# Altium PCB SimpleNode36.PcbDoc
Units mm, origin at the board's own origin, x right, y up, seen from the top; angles counter-clockwise.
Board outline 33 x 14 mm, 2 copper layers (Top Layer, Bottom Layer); 45 components, 43 nets, 178 pads, 36 vias.
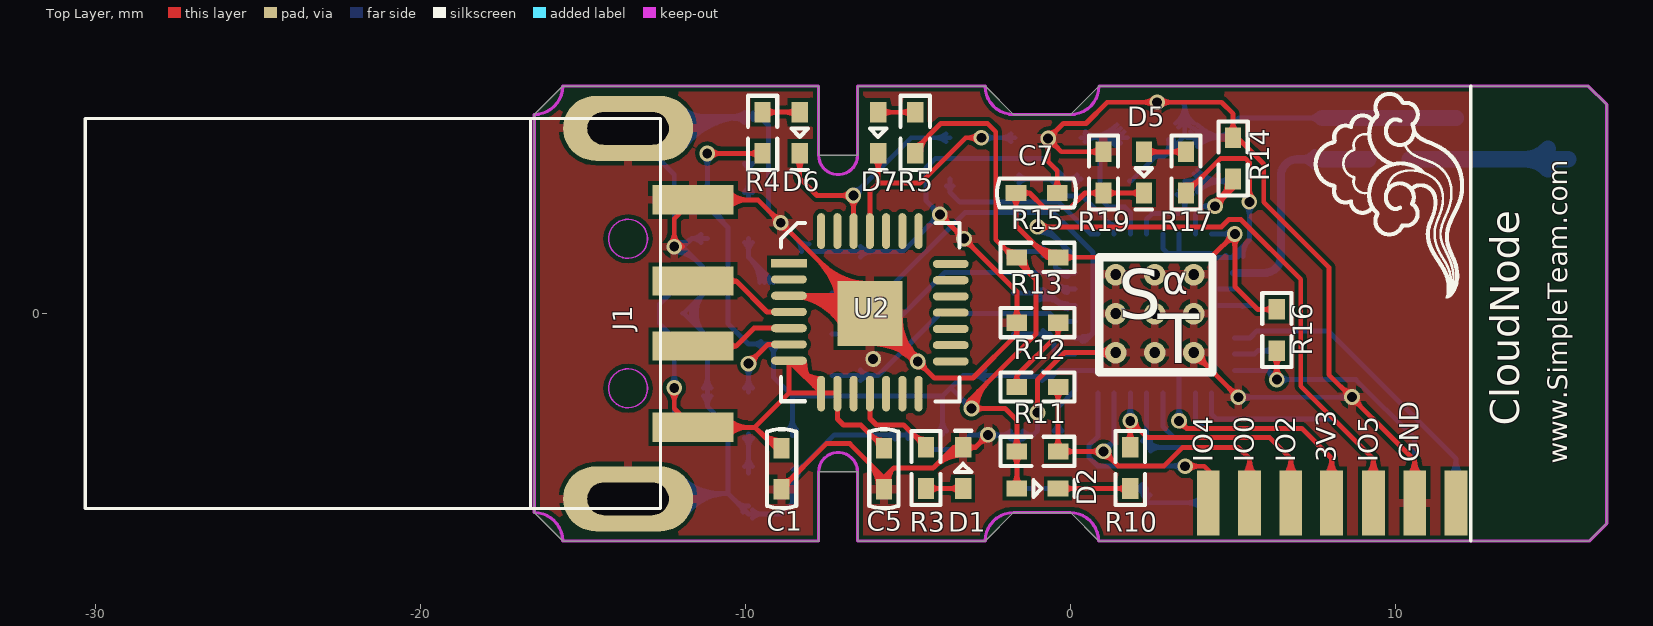
[diagram p0: Top Layer view]
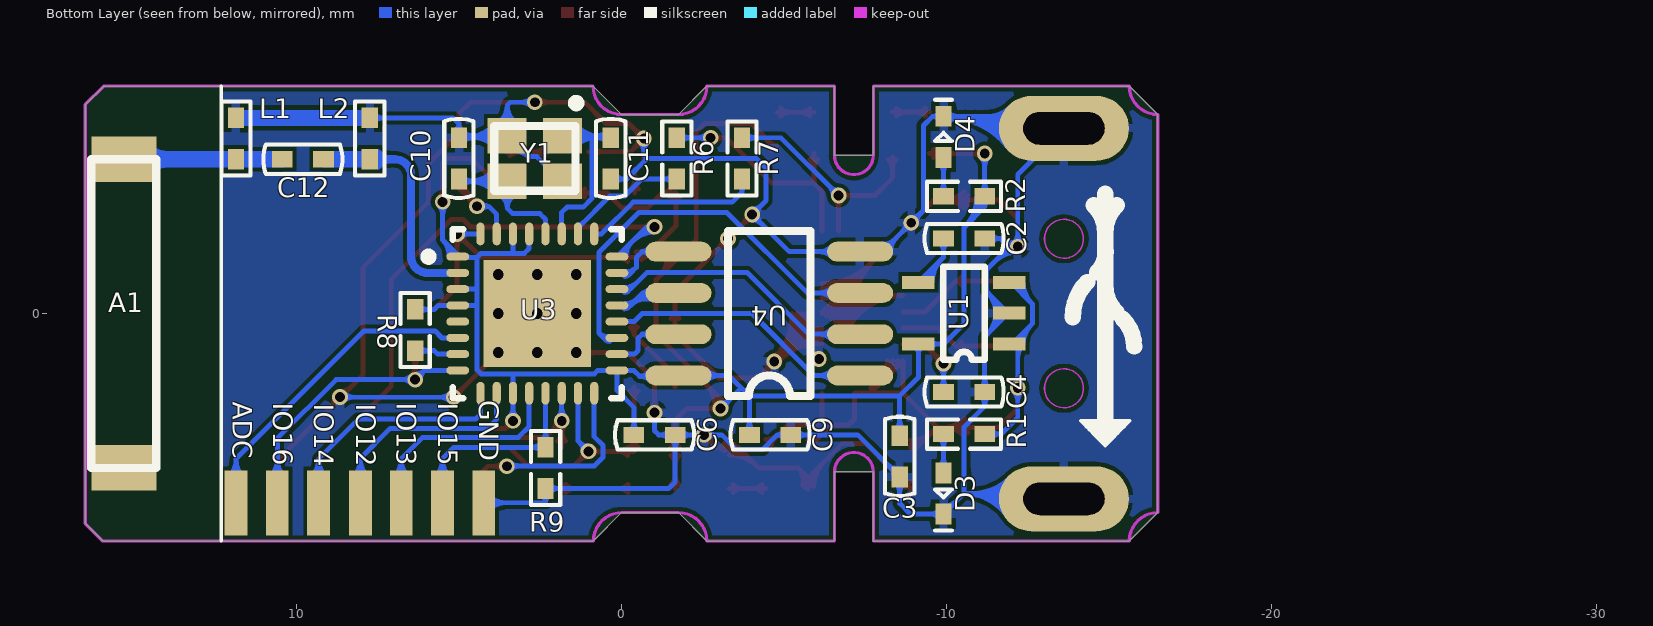
[diagram p1: Bottom Layer view, seen from below]

## Layer stack, top to bottom
Top Layer: signal copper 0.0356
Dielectric: dielectric 0.32, FR-4, Dk 4.8
Bottom Layer: signal copper 0.0356

## Board outline
16.5,6.436 15.936,7 0.875,7 0,6.125 -1.75,6.125 -2.625,7 -6.55,7 -6.55,4.875 -7.75,4.875 -7.75,7 -15.625,7 -16.5,6.125 -16.5,-6.125 -15.625,-7 -7.75,-7 -7.75,-4.875 -6.55,-4.875 -6.55,-7 -2.625,-7 -1.75,-6.125 0,-6.125 0.864,-6.989 0.864,-7 15.962,-7 16.5,-6.462 16.5,6.436

## Design rules (kind name [scope] priority, off if disabled: settings)
Clearance [All] p1: gap=0.127
DiffPairsRouting [All] p1: maxlimit=0.254 minlimit=0.254 mostfreqgap=0.254 maxuncoupledlength=12.7
MinimumSolderMaskSliver [All] p1 off: minsoldermaskwidth=0.127
PolygonConnect [All] p1: connectstyle=Relief reliefconductorwidth=0.254 reliefentries=4 polygonreliefangle="90 Angle"
RoutingVias [All] p1: holewidth=0.305 width=0.483 viastyle="Through Hole" minholewidth=0.305 minwidth=0.483 maxholewidth=0.711 maxwidth=1.27
SilkToSilkClearance [All] p1 off: silktosilkclearance=0.127
SilkscreenOverComponentPads [All] p1 off: minsilkscreentomaskgap=0.127
SolderMaskExpansion [All] p1: expansion=0.102
Width [All] p1: maxlimit=0.508 minlimit=0.152 preferedwidth=0.152
24 further rules are at their usual default settings.

## Classes and differential pairs
differential pair UD: +UD_P -UD_N

## Components (designator, comment, footprint, x,y, rotation, side; value= is the part's Value field where it differs from the comment)
A1 "2.4GHz" AN9520-245 15.316,0 r180 bottom
C1 "105" C0402 -8.89,-4.775 r90 top
C2 "CAP" C0402 -10.541,2.311 r0 bottom
C3 "CAP" C0402 -8.56,-4.394 r90 bottom
C4 "10V" C0402 -10.541,-2.413 r0 bottom
C5 "10V" C0402 -5.74,-4.775 r270 top
C6 "10V" C0402 -1.016,-3.734 r0 bottom
C7 "10V" C0402 -1.041,3.708 r180 top
C9 "10V" C0402 -4.572,-3.734 r0 bottom
C10 "10V" C0402 5.004,4.775 r90 bottom locked
C11 "10V" C0402 0.33,4.775 r270 bottom locked
C12 "10V" C0402 9.804,4.75 r180 bottom
D1 "STA" LED0402 -3.302,-4.75 r90 top
D2 "STA" LED0402 -1.016,-5.385 r0 top
D3 "PW5V" LED0402 -9.906,-5.537 r270 bottom
D4 "PW3V3" LED0402 -9.906,5.436 r90 bottom
D5 "STA" LED0402 2.261,4.343 r270 top
D6 "TXD" LED0402 -8.331,5.563 r270 top
D7 "RXD" LED0402 -5.918,5.563 r270 top
J1 "USB-A" "USB 2.0 Type A 公头 沉板" -13.614,0 r0 top
L1 "NC" L0402 11.862,5.385 r90 bottom
L2 "NC" L0402 7.747,5.385 r90 bottom
R1 "5%" R0402 -10.541,-3.708 r0 bottom
R2 "5%" R0402 -10.541,3.607 r180 bottom
R3 "5%" R0402 -4.445,-4.75 r270 top
R4 "5%" R0402 -9.474,5.563 r270 top
R5 "5%" R0402 -4.775,5.563 r90 top
R6 "5%" R0402 -1.702,4.775 r90 bottom
R7 "5%" R0402 -3.708,4.775 r270 bottom
R8 "1%" R0402 6.35,-0.508 r270 bottom
R9 "5%" R0402 2.337,-4.75 r90 bottom
R10 "5%" R0402 1.841,-4.75 r90 top
R11 "5%" R0402 -1.016,-4.242 r180 top
R12 "5%" R0402 -1.016,-2.261 r180 top
R13 "FLASH" R0402 -1.016,-0.279 r0 top
R14 "1%" R0402 5.004,4.775 r90 top
R15 "5%" R0402 -1.016,1.727 r180 top
R16 "5%" R0402 6.35,-0.508 r270 top
R17 "5%" R0402 3.556,4.343 r90 top
R19 "RESET" R0402 1.016,4.343 r270 top
U1 "SPX3819M5-L-3-3" SOT25-5 -10.541,0.076 r0 bottom
U2 "CP2102" MLP28 -6.172,0 r0 top locked
U3 "ESP8266" QFN32L 2.591,0 r180 bottom
U4 "2M Flash" SOP8 -4.547,0 r0 bottom locked
Y1 "10ppm" XTAL-2520 2.667,4.775 r0 bottom locked

## Footprints (in the part's own frame and the unit in brackets; to place one, negate y for a bottom-side part, rotate by r counter-clockwise, add the part's x,y. Pads: shape width x height; smd on the part's side, far side on the other; paste and mask are expansions set on the pad)
AN9520-245 [mm]
  rect 2x1.4 smd: 0(0,-4.75) 1(0,4.75)
  silkscreen extent -1,-4.75 1,4.75
C0402 [mm]
  rect 0.635x0.5 smd: 1(-0.635,0) 2(0.635,0)
  silkscreen extent -1.22,-0.45 1.22,0.45
L0402 [mm]
  rect 0.635x0.5 smd: 1(-0.635,0) 2(0.635,0)
  silkscreen extent -1.14,-0.45 1.14,0.45
LED0402 [mm]
  rect 0.635x0.5 smd: 1(-0.632,0) 2(0.633,0)
  silkscreen extent -0.13,-0.25 1.14,0.25
MLP28 [mm]
  rect 1.1x0.25 smd: 1(-2.489,1.549)
  oval 1.1x0.25 smd: 2(-2.489,1.049) 3(-2.489,0.549) 4(-2.489,0.049) 5(-2.489,-0.451) 6(-2.489,-0.951) 7(-2.489,-1.451) 15(2.489,-1.473) 16(2.489,-0.973) 17(2.489,-0.473) 18(2.489,0.027) 19(2.489,0.527) 20(2.489,1.027) 21(2.489,1.527)
  rect 2x2 smd: 3(0,0)
  oval 0.25x1.1 smd: 8(-1.499,-2.464) 9(-0.999,-2.464) 10(-0.499,-2.464) 11(0.001,-2.464) 12(0.501,-2.464) 13(1.001,-2.464) 14(1.501,-2.464) 22(1.499,2.54) 23(0.999,2.54) 24(0.499,2.54) 25(-0.001,2.54) 26(-0.501,2.54) 27(-1.001,2.54) 28(-1.501,2.54)
  silkscreen extent -2.74,-2.71 2.76,2.79
QFN32L [mm]
  oval 0.7x0.25 smd: 1(-2.45,1.75) 2(-2.45,1.25) 3(-2.45,0.75) 4(-2.45,0.25) 5(-2.45,-0.25) 6(-2.45,-0.75) 7(-2.45,-1.25) 8(-2.45,-1.75) 17(2.45,-1.75) 18(2.45,-1.25) 19(2.45,-0.75) 20(2.45,-0.25) 21(2.45,0.25) 22(2.45,0.75) 23(2.45,1.25) 24(2.45,1.75)
  oval 0.25x0.7 smd: 9(-1.75,-2.45) 10(-1.25,-2.45) 11(-0.75,-2.45) 12(-0.25,-2.45) 13(0.25,-2.45) 14(0.75,-2.45) 15(1.25,-2.45) 16(1.75,-2.45) 25(1.75,2.45) 26(1.25,2.45) 27(0.75,2.45) 28(0.25,2.45) 29(-0.25,2.45) 30(-0.75,2.45) 31(-1.25,2.45) 32(-1.75,2.45)
  rect 3.3x3.3 smd: 33(0,0)
  silkscreen extent -3.48,-2.6 2.6,2.6, body extent -2.58,-2.58 2.58,2.58, height 0.8
R0402 [mm]
  rect 0.635x0.5 smd: 1(-0.635,0) 2(0.635,0)
  silkscreen extent -1.14,-0.45 1.14,0.45
SOP8 [mil]
  oval 80x24 smd: 1(-110,75) 2(-110,25) 3(-110,-25) 4(-110,-75) 5(110,-75) 6(110,-25) 7(110,25) 8(110,75)
  silkscreen extent -50,-100 50,100, body extent -125,-98 125,99, height 74
SOT25-5 [mm]
  rect 1x0.4 smd: 1(-1.397,1.016) 2(-1.397,0.066) 3(-1.397,-0.884) 4(1.403,-0.884) 5(1.403,1.016)
  silkscreen extent -0.64,-1.36 0.64,1.49
"USB 2.0 Type A 公头 沉板" [mm]
  oval 1.5x1.4 on Bottom Overlay: 1(-1.27,3.683)
  rect 2.5x0.9 smd: 1(2,-3.5) 2(2,-1) 3(2,1) 4(2,3.5)
  oval 4x2 hole 1 slot 2.5 at 0 deg: 4(0,-5.7) 4(0,5.7)
  Keep-Out Layer circle w0.05: c0,-2.3 r0.6
  Keep-Out Layer circle w0.05: c0,2.3 r0.6
  silkscreen extent -16.7,-6 1,6
XTAL-2520 [mm]
  rect 1.2x1.1 smd: 1(-0.85,-0.7) 2(0.85,-0.7) 3(0.85,0.7) 4(-0.85,0.7)
  silkscreen extent -1.4,-1.83 1.25,1

## Part data
A1: library part AN9520-245
C1 C7: library part 贴片无极性电容
D1 D2 D3 D4: library part 贴片发光二级管
D5 D6 D7: library part 贴片发光二级管, "贴片发光二级管"
R4 R5 R6 R7 R15 R16 R17 R19: library part 贴片电阻
U4: library part GD25Q16CSIG

## Free pads (board coordinates)
  rect 0.7x2 smd: 1(4.242,-5.822) 2(5.511,-5.822) 3(6.781,-5.822) 4(8.033,-5.822) 5(9.321,-5.822) 6(10.591,-5.822) 7(11.861,-5.822)
  rect 0.7x2 smd far side: 8(4.241,-5.822) 9(5.511,-5.822) 10(6.781,-5.822) 11(8.033,-5.822) 12(9.321,-5.822) 13(10.591,-5.822) 14(11.861,-5.822)

## Via types
v1: diameter 0.483, hole 0.305, Top Layer to Bottom Layer, 27 vias
v2: diameter 0.66, hole 0.33, Top Layer to Bottom Layer, tented top, 9 vias

## Nets (pads, with @x,y where several pads share a name; then routed paths per layer and width w, separated by ;. In a path a pad name is that pad's centre, name@x,y a point inside that pad or via, vN(x,y) a via of type N, cw(c..) or ccw(c..) an arc to the next point about the centre after c; other vN are vias at no path point)
ADC: pad.14 U3.6 | length 10.9
  Bottom Layer w0.152: U3.6 5.524,-0.75 5.74,-0.533 7.925,-0.533 11.862,-4.47 pad.14 ; pad.14@11.668,-4.978 ccw(c11.199,-4.51) 11.862,-4.51 ; 11.862,-4.512 ccw(c12.521,-4.512) pad.14@12.055,-4.978
GND: C1.1 C2.1 C3.1 C4.1 C5.2 C6.1 C7.1 C9.1 C10.2 C11.2 D1.2 D3.2 D4.2 J1.4 L1.2 L2.2 pad.6 pad.8 R9.1 R13.1 R14.2 R19.1 U1.2 U2.3 U3.33 U4.4 Y1.2 Y1.4 | length 255.7
  Top Layer w0.152: v1@-12.309,2.174 ccw(c-12.591,2.456) -12.192,2.456 ccw(c-11.793,2.456) v1@-12.075,2.174 ; v1@-12.116,2.235 -11.938,2.057 ; v1@-12.041,1.99 cw(c-11.938,1.945) -11.938,2.057 ; v1@-12.041,2.124 ccw(c-11.938,2.17) -11.938,2.057 ; J1.4@-10.658,3.343 cw(c-10.28,2.965) -10.28,3.5 cw(c-10.28,4.035) J1.4@-10.658,3.657 ; J1.4@-10.55,3.236 cw(c-9.912,2.598) -9.912,3.5 cw(c-9.912,4.402) J1.4@-10.55,3.764 ; v1@-9.08,2.794 ccw(c-9.479,2.794) -9.197,3.076 ccw(c-8.915,3.358) v1@-8.915,2.959 ; v1@-8.915,2.629 cw(c-8.915,2.23) -8.634,2.512 cw(c-8.352,2.794) v1@-8.75,2.794 ; C1.1 -8.89,-5.385 -7.51,-4.005 -6.79,-4.005 -5.74,-5.054 ; C1.1@-8.89,-5.169 ccw(c-8.89,-4.648) -8.522,-5.016 ; C1.1@-8.716,-5.343 cw(c-8.398,-5.343) -8.623,-5.118 ; U2.3@-8.404,0.549 cw(c-8.404,-1.225) U2.3@-6.848,-0.371 ; U2.3@-8.207,0.51 cw(c-8.11,0.378) -8.086,0.54 ; U2.3@-8.195,0.576 ccw(c-7.995,0.705) -8.045,0.472 ; U2.3@-8.146,0.549 cw(c-8.146,-1.084) U2.3@-6.715,-0.298 ; -7.889,0.549 cw(c-7.889,-0.942) U2.3@-6.581,-0.225 ; -7.785,1.664 cw(c-9.449,0) U2.3@-7.096,0 ; -7.663,1.541 ccw(c-6.172,3.031) U2.3@-6.172,0.924 ; -7.631,0.549 cw(c-7.631,-0.801) U2.3@-6.448,-0.151 ; -7.525,1.404 cw(c-8.929,0) U2.3@-6.944,0 ; -7.402,1.281 ccw(c-6.172,2.511) U2.3@-6.172,0.771 ; -7.374,0.549 cw(c-7.374,-0.66) U2.3@-6.314,-0.078 ; -7.265,1.143 cw(c-8.408,0) U2.3@-6.791,0 ; -7.142,1.021 ccw(c-6.172,1.991) U2.3@-6.172,0.619 ; U2.3@-7.116,0.549 cw(c-7.116,-0.518) U2.3@-6.18,-0.005 ; U2.3@-7.076,0.549 ccw(c-7.076,0.904) U2.3@-6.825,0.653 ; U2.3@-7.005,0.883 cw(c-7.888,0) U2.3@-6.639,0 ; U2.3@-6.982,-0.444 ccw(c-8.661,-1.366) -8.661,0.549 U2.3@-6.722,0.549 ; U2.3@-6.882,0.761 ccw(c-6.172,1.47) U2.3@-6.172,0.467 ; -6.241,-4.554 cw(c-7.03,-5.343) C5.2@-5.914,-5.343 ; U2.3@-6.172,-0.924 cw(c-6.172,-3.154) -4.595,-1.577 cw(c-3.018,0) U2.3@-5.248,0 ; U2.3@-6.172,-0.771 cw(c-6.172,-2.634) -4.855,-1.317 cw(c-3.538,0) U2.3@-5.401,0 ; U2.3@-6.172,-0.619 cw(c-6.172,-2.113) -5.116,-1.057 cw(c-4.059,0) U2.3@-5.553,0 ; U2.3@-6.172,-0.467 cw(c-6.172,-1.593) -5.376,-0.797 cw(c-4.579,0) U2.3@-5.706,0 ; U2.3@-6.172,0 -6.172,0.051 v1(-8.915,2.794) -9.621,3.5 -11.614,3.5 -12.192,2.922 v1(-12.192,2.057) -11.938,2.057 ; -5.981,-4.814 cw(c-6.51,-5.343) C5.2@-5.762,-5.343 ; C5.2@-5.822,-5.189 ccw(c-5.893,-5.054) -5.74,-5.054 ; C5.2 -5.74,-5.054 ; C5.2@-5.72,-5.337 cw(c-5.328,-5.22) -5.617,-4.931 ; -5.721,-5.074 cw(c-5.989,-5.343) C5.2@-5.609,-5.343 ; C5.2@-5.659,-5.189 cw(c-5.588,-5.054) -5.74,-5.054 ; C5.2@-5.574,-5.293 cw(c-5.048,-5.137) -5.436,-4.75 ; -5.284,-1.039 ccw(c-4.834,-0.822) v1@-4.732,-1.312 ; U2.3@-5.177,-0.869 cw(c-5.35,-1.339) v1@-4.861,-1.44 ; -5.067,-1.162 cw(c-5.371,-1.578) v1@-4.862,-1.499 ; -5.01,-1.105 ccw(c-4.594,-0.801) v1@-4.674,-1.31 ; -4.988,-1.319 cw(c-5.152,-1.567) v1@-4.861,-1.507 ; -4.934,-1.259 ccw(c-4.768,-1.031) v1@-4.724,-1.31 ; -4.913,-1.238 cw(c-5.141,-1.404) v1@-4.862,-1.448 ; v1@-4.864,-1.473 ccw(c-5.263,-1.473) -4.981,-1.191 ccw(c-4.699,-0.91) v1@-4.699,-1.308 ; -4.854,-1.184 ccw(c-4.605,-1.021) v1@-4.666,-1.312 ; v1@-4.699,-1.638 cw(c-4.699,-2.037) -4.417,-1.755 cw(c-4.135,-1.473) v1@-4.534,-1.473 ; v1(-4.699,-1.473) -4.191,-1.981 -2.997,-1.981 -1.651,-0.635 ; -4.21,-4.735 cw(c-3.302,-5.643) D1.2@-3.302,-4.359 ; v1@-4.02,2.883 cw(c-4.02,2.484) -3.738,2.766 cw(c-3.456,3.048) v1@-3.855,3.048 ; v1(-4.02,3.048) -1.651,0.679 R13.1 ; -3.95,-4.475 cw(c-3.302,-5.122) D1.2@-3.302,-4.206 ; -3.69,-4.214 cw(c-3.302,-4.602) D1.2@-3.302,-4.054 ; D1.2@-3.455,-4.2 ccw(c-3.593,-4.273) -3.593,-4.117 ; D1.2@-3.455,-4.035 cw(c-3.593,-3.961) -3.593,-4.117 ; v1@-3.442,2.305 ccw(c-3.84,2.305) -3.558,2.587 ccw(c-3.277,2.868) v1@-3.277,2.47 ; v1@-3.277,2.14 cw(c-3.277,1.741) -2.995,2.023 cw(c-2.713,2.305) v1@-3.111,2.305 ; D1.2@-3.17,-4.231 cw(c-2.924,-4.443) -2.924,-4.117 ; D1.2@-3.17,-4.004 ccw(c-2.924,-3.792) -2.924,-4.117 ; v1@-2.705,-3.734 cw(c-3.104,-3.734) -2.822,-4.016 cw(c-2.54,-4.297) v1@-2.54,-3.899 ; v1(-2.54,-3.734) -2.923,-4.117 ; R13.1@-1.774,-0.157 ccw(c-2.071,0.14) -1.651,0.14 ccw(c-1.231,0.14) R13.1@-1.528,-0.157 ; R13.1@-1.758,-0.417 cw(c-1.928,-0.635) -1.651,-0.635 ; R13.1@-1.651,-0.33 -1.651,-0.635 ; R13.1@-1.544,-0.417 ccw(c-1.374,-0.635) -1.651,-0.635 ; v1@-1.133,-2.931 ccw(c-1.415,-2.649) -1.016,-2.649 ccw(c-0.617,-2.649) v1@-0.899,-2.931 ; v1(-1.016,-3.048) -1.016,-2.041 -0.175,-1.2 v2(1.391,-1.2) ; v1@-0.803,5.268 cw(c-1.084,4.986) -0.686,4.986 cw(c-0.287,4.986) v1@-0.569,5.268 ; v1@-0.686,5.22 cw(c-0.686,4.821) -0.404,5.103 cw(c-0.122,5.385) -0.521,5.385 cw(c-0.122,5.385) -0.404,5.667 cw(c-0.686,5.948) v1@-0.686,5.55 ; C7.1@-0.529,3.831 ccw(c-0.826,4.128) -0.406,4.128 ccw(c0.013,4.128) C7.1@-0.284,3.831 ; C7.1 -0.406,4.394 -0.686,4.674 v1(-0.686,5.385) ; R19.1@0.893,4.856 ccw(c0.596,4.559) 0.596,4.978 ccw(c0.596,5.398) R19.1@0.893,5.101 ; R19.1 -0.279,4.978 v1(-0.686,5.385) ; v2@1.211,-1.379 ccw(c0.778,-1.813) 0.778,-1.2 ccw(c0.778,-0.587) v2@1.211,-1.021 ; v1@2.55,6.386 ccw(c2.268,6.104) 2.268,6.502 ccw(c2.268,6.901) v1@2.55,6.619 ; v1@2.784,6.386 cw(c3.066,6.104) 3.066,6.502 cw(c3.066,6.901) v1@2.784,6.619 ; v2@3.791,-1.454 cw(c3.791,-2.067) 4.224,-1.633 cw(c4.657,-1.2) v2@4.045,-1.2 ; v2(3.791,-1.2) v1(5.166,-2.575) ; R14.2@4.881,5.601 ccw(c4.584,5.897) 5.004,5.897 ccw(c5.423,5.897) R14.2@5.127,5.601 ; v1@5.001,-2.575 ccw(c4.602,-2.575) 4.884,-2.293 ccw(c5.166,-2.011) v1@5.166,-2.41 ; 8.336,-2.266 ccw(c8.661,-1.94) v1@8.661,-2.4 ; 8.398,-2.327 cw(c8.159,-2.565) v1@8.496,-2.565 ; v1@8.661,-2.73 cw(c8.661,-3.068) 8.9,-2.829 ; v1@8.826,-2.565 ccw(c9.286,-2.565) 8.961,-2.891 ; pad.6@10.4,-4.976 ccw(c9.956,-4.521) 10.592,-4.521 ; pad.6 10.592,-4.521 ; pad.6@10.783,-4.976 cw(c11.229,-4.521) 10.592,-4.521 ; -5.74,-5.054 -5.436,-4.75 ; -5.436,-4.75 -4.225,-4.75 -3.593,-4.117 ; -3.593,-4.117 D1.2 -2.923,-4.117 ; v1(-0.686,5.385) -0.221,5.85 0.476,5.85 1.129,6.502 v1(2.667,6.502) 4.648,6.502 5.004,6.147 R14.2 5.138,5.41 5.948,4.6 5.948,3.425 7.95,1.422 7.95,-1.88 10.592,-4.521
  Bottom Layer w0.152: J1.4@-13.449,-5.535 -10.541,-5.535 ; J1.4@-13.246,6.068 J1.4@-11.824,6.068 ; J1.4@-12.538,4.886 -12.538,5.354 J1.4@-11.824,6.068 ; J1.4@-12.489,5.598 cw(c-11.504,4.801) -11.504,6.068 ; J1.4@-12.37,5.502 cw(c-11.184,4.542) -11.184,6.068 ; v1@-12.309,2.174 ccw(c-12.591,2.456) -12.192,2.456 ccw(c-11.793,2.456) v1@-12.075,2.174 ; J1.4@-12.252,5.406 cw(c-10.865,4.283) -10.865,6.068 ; J1.4@-12.23,-5.965 cw(c-11.411,-6.529) -11.411,-5.535 ; v1@-12.192,1.892 cw(c-12.192,0.881) -11.477,1.596 ; v1@-12.192,2.045 cw(c-12.192,1.401) -11.737,1.856 ; J1.4@-12.192,5.055 J1.4@-13.614,5.7 ; v1@-12.187,2.069 ccw(c-12.065,2.387) -11.824,2.146 ; J1.4@-12.177,-5.262 ccw(c-11.519,-4.605) -11.519,-5.535 ; J1.4@-12.133,5.31 cw(c-10.545,4.025) -10.545,6.068 ; v1@-12.132,2.211 ccw(c-11.972,2.625) -11.659,2.311 ; J1.4@-12.105,-6.051 cw(c-11.121,-6.729) -11.121,-5.535 ; J1.4@-12.069,-5.155 ccw(c-11.151,-4.237) -11.151,-5.535 ; J1.4@-12.069,6.245 ccw(c-11.641,6.674) -11.641,6.068 ; v1@-12.047,1.978 cw(c-11.913,1.904) -11.913,2.057 ; v1@-12.047,2.137 ccw(c-11.913,2.211) -11.913,2.057 ; J1.4@-12.015,5.215 cw(c-10.226,3.766) -10.226,6.068 ; J1.4@-11.979,-6.138 cw(c-10.831,-6.929) -10.831,-5.535 ; J1.4@-11.961,-5.047 ccw(c-10.783,-3.869) -10.783,-5.535 ; J1.4@-11.961,6.353 ccw(c-11.273,7.042) -11.273,6.068 ; U1.2 U1.2@-11.901,0.01 ; J1.4@-11.896,5.119 cw(c-9.906,3.507) D4.2 ; J1.4@-11.854,-6.224 cw(c-10.541,-7.129) -10.541,-5.535 ; -11.501,-0.389 cw(c-11.102,0.01) -11.667,0.01 cw(c-11.102,0.01) -11.501,0.41 ; C2.1@-11.367,2.189 ccw(c-11.659,1.903) -11.659,2.311 ; C2.1@-11.367,2.433 cw(c-11.659,2.72) -11.659,2.311 ; C4.1@-11.299,-2.536 cw(c-11.596,-2.833) -11.176,-2.833 cw(c-10.756,-2.833) C4.1@-11.053,-2.536 ; C4.1@-11.299,-2.29 ccw(c-11.596,-1.993) -11.176,-1.993 ccw(c-10.756,-1.993) C4.1@-11.053,-2.29 ; -11.241,-0.649 cw(c-10.581,0.01) -11.514,0.01 cw(c-10.581,0.01) -11.241,0.67 ; C2.1 -11.659,2.311 ; -10.374,6.003 cw(c-10.32,5.615) D4.2@-10.033,5.882 ; -10.318,-5.758 ccw(c-9.906,-5.346) D3.2@-9.906,-5.928 ; -10.171,6.031 ccw(c-10.197,6.221) D4.2@-10.045,6.105 ; D3.2@-10.155,-5.921 cw(c-10.336,-6.102) D3.2@-10.08,-6.102 ; D4.2@-10.029,5.945 ccw(c-10.326,5.649) -10.326,6.068 ccw(c-10.326,6.488) D4.2@-10.029,6.191 ; D3.2@-9.783,-6.293 cw(c-9.486,-6.589) -9.486,-6.17 cw(c-9.486,-5.75) D3.2@-9.783,-6.047 ; D4.2@-9.763,5.969 cw(c-9.573,5.837) -9.573,6.068 ; D4.2@-9.763,6.167 ccw(c-9.573,6.3) -9.573,6.068 ; v1@-9.08,2.794 ccw(c-9.479,2.794) -9.197,3.076 ccw(c-8.915,3.358) v1@-8.915,2.959 ; v1@-8.915,2.629 cw(c-8.915,2.23) -8.634,2.512 cw(c-8.352,2.794) v1@-8.75,2.794 ; C3.1@-8.683,-5.22 cw(c-8.979,-5.516) -8.56,-5.516 cw(c-8.14,-5.516) C3.1@-8.437,-5.22 ; C3.1@-8.56,-4.788 ccw(c-8.56,-4.205) -8.148,-4.617 ; -8.46,2.339 cw(c-8.894,1.905) U4.4@-8.28,1.905 ; -8.399,2.277 ccw(c-8.052,2.624) U4.4@-8.052,2.134 ; C3.1@-8.386,-4.962 cw(c-8.129,-4.962) C3.1@-8.311,-4.78 ; U4.4@-6.468,1.743 cw(c-6.078,1.353) -6.078,1.905 cw(c-6.078,2.457) U4.4@-6.468,2.067 ; C9.1@-5.397,-3.857 ccw(c-5.694,-4.153) -5.694,-3.734 ccw(c-5.694,-3.314) C9.1@-5.397,-3.611 ; C9.1@-5,-3.838 cw(c-4.792,-3.995) -4.792,-3.734 ; C9.1@-5,-3.63 ccw(c-4.792,-3.473) -4.792,-3.734 ; v1@-4.02,2.883 ccw(c-4.02,2.484) -4.302,2.766 ccw(c-4.583,3.048) -4.185,3.048 ccw(c-4.583,3.048) -4.302,3.33 ccw(c-4.02,3.612) v1@-4.02,3.213 ; v1@-2.657,-3.851 ccw(c-2.939,-4.132) -2.939,-3.734 ccw(c-2.939,-3.335) v1@-2.657,-3.617 ; v1@-2.423,-3.851 cw(c-2.141,-4.132) -2.141,-3.734 cw(c-2.141,-3.335) v1@-2.423,-3.617 ; C6.1@-1.841,-3.857 ccw(c-2.138,-4.153) -2.138,-3.734 ccw(c-2.138,-3.314) C6.1@-1.841,-3.611 ; C6.1@-1.774,-3.857 cw(c-2.071,-4.153) -1.651,-4.153 cw(c-1.231,-4.153) C6.1@-1.528,-3.857 ; C6.1@-1.461,-3.857 cw(c-1.164,-4.153) -1.164,-3.734 cw(c-1.164,-3.314) C6.1@-1.461,-3.611 ; v1@-1.133,-3.165 cw(c-1.415,-3.447) -1.016,-3.447 cw(c-0.617,-3.447) v1@-0.899,-3.165 ; v1(-1.016,-3.048) -1.016,-3.607 -1.143,-3.734 C6.1 ; v1@-0.803,5.268 cw(c-1.084,4.986) -0.686,4.986 cw(c-0.287,4.986) v1@-0.569,5.268 ; v1(-0.686,5.385) -0.686,4.877 -0.787,4.775 ; C11.2@0.207,4.017 ccw(c-0.089,3.721) -0.089,4.14 ccw(c-0.089,4.56) C11.2@0.207,4.263 ; C11.2 -0.152,4.14 -0.787,4.775 ; Y1.4 1.854,4.075 2.608,4.828 2.87,4.828 ; R9.1@2.214,-5.508 ccw(c1.917,-5.804) 1.917,-5.385 ccw(c1.917,-4.965) R9.1@2.214,-5.262 ; R9.1@2.226,-5.586 cw(c2.031,-5.822) 2.337,-5.822 ; R9.1@2.448,-5.586 ccw(c2.643,-5.822) 2.337,-5.822 ; v1(2.667,6.502) 3.429,6.502 3.517,6.414 ; v1@2.784,6.386 cw(c3.066,6.104) 3.066,6.502 cw(c3.066,6.901) v1@2.784,6.619 ; Y1.2@3.01,5.351 cw(c2.488,5.21) 2.87,4.828 ; Y1.2@3.056,5.015 ccw(c2.781,5.29) Y1.2@3.157,5.391 ; Y1.2@3.086,5.045 cw(c3.367,4.764) Y1.2@3.422,5.157 ; Y1.2@3.235,5.856 ccw(c2.823,6.414) 3.517,6.414 ; Y1.2@3.326,5.734 ccw(c3.046,6.112) 3.517,6.112 ccw(c3.988,6.112) Y1.2@3.708,5.734 ; Y1.2@3.401,5.006 ccw(c3.314,4.385) 2.87,4.828 ; Y1.2@3.582,5.41 C10.2 5.004,5.842 ; Y1.2@3.687,5.595 ccw(c4.132,6.04) 4.132,5.41 ; Y1.2@3.794,5.248 cw(c4.186,4.856) 4.186,5.41 ; Y1.2@3.794,5.702 ccw(c4.5,6.408) 4.5,5.41 ; Y1.2@3.799,5.856 cw(c4.211,6.414) 3.517,6.414 ; Y1.2@3.902,5.14 cw(c4.554,4.488) 4.554,5.41 ; Y1.2@3.902,5.81 ccw(c4.868,6.776) C10.2@4.868,5.41 ; pad.8@4.048,-6.016 ccw(c3.58,-6.483) 3.58,-5.822 ccw(c3.58,-5.161) pad.8@4.048,-5.628 ; pad.8@4.343,-5.822 2.337,-5.822 ; 4.515,5.486 ccw(c4.597,5.866) C10.2@4.878,5.598 ; C10.2@4.881,5.287 ccw(c4.584,4.991) 4.584,5.41 ccw(c4.584,5.83) C10.2@4.881,5.533 ; C10.2@4.894,5.613 ccw(c4.709,5.842) 5.004,5.842 ; C10.2@5.113,5.613 cw(c5.299,5.842) 5.004,5.842 ; v1(5.166,-2.575) v1@8.652,-2.575 ; v1@5.283,-2.692 cw(c5.564,-2.974) 5.564,-2.575 cw(c5.564,-2.176) v1@5.283,-2.458 ; L2.2@7.624,5.897 ccw(c7.327,5.6) 7.327,6.02 ccw(c7.327,6.439) L2.2@7.624,6.143 ; L2.2 5.182,6.02 5.004,5.842 ; 8.24,-2.575 ccw(c8.24,-2.144) v1@8.545,-2.449 ; 8.286,-2.575 cw(c8.286,-2.941) v1@8.545,-2.682 ; J1.4@-13.614,5.7 -12.192,4.278 v1(-12.192,2.057) -11.938,2.057 ; J1.4@-13.614,5.7 -12.192,5.7 J1.4@-11.824,6.068 ; -11.938,2.057 cw(c-11.938,2.17) -12.041,2.124 ccw(c-11.938,2.17) -11.938,2.057 ; -11.938,2.057 ccw(c-11.938,1.945) -12.041,1.99 cw(c-11.938,1.945) -11.938,2.057 ; -11.938,2.057 -11.913,2.057 ; -11.938,2.057 -11.235,1.354 -11.235,0.676 U1.2@-11.901,0.01 ; -11.913,2.057 -11.659,2.311 ; U1.2@-11.901,0.01 -11.176,-0.714 C4.1 -11.176,-2.854 -10.541,-3.489 -10.541,-5.535 ; J1.4@-11.824,6.068 D4.2 ; -10.541,-5.535 D3.2 -8.888,-6.17 -8.56,-5.842 C3.1 -7.264,-3.734 C9.1 -4.792,-3.734 ; D4.2 -9.573,6.068 ; -9.573,6.068 -9.294,5.789 -9.294,3.173 v1(-8.915,2.794) -8.026,1.905 U4.4 -5.163,1.905 v1(-4.02,3.048) -4.445,3.473 -4.445,4.478 -4.147,4.775 -0.787,4.775 ; -4.792,-3.734 -4.339,-4.187 -3.535,-4.187 -3.082,-3.734 v1(-2.54,-3.734) C6.1 ; C6.1 -1.651,-5.182 -1.448,-5.385 R9.1 2.337,-5.822 ; 2.87,4.828 Y1.2 3.517,6.414
  Bottom Layer w0.5: L2.2 L1.2
  other v1: 8.661,-2.565 -6.071,-1.397 -3.277,2.305
  other v2: 2.591,-1.2 1.391,0 2.591,0 3.791,0 1.391,1.2 2.591,1.2 3.791,1.2
GPIO0: pad.2 R11.1 R12.1 U3.15 | length 16.6
  Top Layer w0.152: R11.1@-0.504,-4.119 ccw(c-0.801,-3.822) -0.381,-3.822 ccw(c0.039,-3.822) R11.1@-0.258,-4.119 ; R12.1@-0.504,-2.383 cw(c-0.801,-2.68) -0.381,-2.68 cw(c0.039,-2.68) R12.1@-0.258,-2.383 ; R12.1 R11.1 v1(1.016,-4.242) 1.46,-4.686 2.883,-4.686 3.454,-4.115 5.156,-4.115 5.512,-4.47 pad.2 ; R11.1@-0.191,-4.365 cw(c0.106,-4.661) 0.106,-4.242 cw(c0.106,-3.822) R11.1@-0.191,-4.119 ; v1@0.899,-4.359 ccw(c0.617,-4.64) 0.617,-4.242 ccw(c0.617,-3.843) v1@0.899,-4.125 ; v1@1.016,-4.407 cw(c1.016,-4.805) 1.298,-4.524 cw(c1.58,-4.242) v1@1.181,-4.242 ; pad.2@5.318,-4.978 ccw(c4.849,-4.51) 5.512,-4.51 ; 5.512,-4.512 ccw(c6.171,-4.512) pad.2@5.705,-4.978
  Bottom Layer w0.152: v1(1.016,-4.242) 1.341,-3.917 U3.15 ; v1@1.016,-4.077 ccw(c1.016,-3.678) 1.298,-3.96 ccw(c1.58,-4.242) v1@1.181,-4.242
GPIO2: pad.3 R10.2 U3.14 | length 12
  Top Layer w0.152: R10.2@1.718,-3.924 ccw(c1.421,-3.628) 1.841,-3.628 ccw(c2.26,-3.628) R10.2@1.964,-3.924 ; v1@1.724,-3.419 cw(c1.442,-3.701) 1.841,-3.701 cw(c2.239,-3.701) v1@1.958,-3.419 ; R10.2 v1(1.841,-3.302) 2.349,-3.81 6.121,-3.81 6.782,-4.47 pad.3 ; v1@1.841,-3.467 cw(c1.841,-3.866) 2.123,-3.584 cw(c2.404,-3.302) v1@2.006,-3.302 ; pad.3@6.588,-4.978 ccw(c6.119,-4.51) 6.782,-4.51 ; 6.782,-4.512 ccw(c7.441,-4.512) pad.3@6.975,-4.978
  Bottom Layer w0.152: v1@1.724,-3.185 ccw(c1.442,-2.903) 1.841,-2.903 ccw(c2.239,-2.903) v1@1.958,-3.185 ; v1(1.841,-3.302) U3.14
GPIO4: pad.1 U3.16 | length 8.2
  Top Layer w0.152: v1(3.531,-4.699) 4.115,-4.699 4.343,-4.928 pad.1@4.343,-5.131 ; v1@3.647,-4.816 cw(c3.929,-5.098) 3.929,-4.699 cw(c3.929,-4.3) v1@3.647,-4.582 ; pad.1 pad.1@4.242,-5.131
  Bottom Layer w0.152: U3.16 0.841,-3.788 0.572,-4.058 0.572,-4.426 0.832,-4.686 v1@3.531,-4.686 ; 3.101,-4.686 cw(c3.101,-5.128) v1@3.414,-4.816 ; 3.163,-4.686 ccw(c3.163,-4.331) v1@3.414,-4.582
GPIO5: pad.5 U3.24 | length 22
  Top Layer w0.152: v1(-1.016,2.667) 4.647,2.667 4.875,2.895 5.243,2.895 7.087,1.051 7.087,-2.235 9.321,-4.47 pad.5 ; v1@-0.899,2.55 cw(c-0.617,2.268) -0.617,2.667 cw(c-0.617,3.066) v1@-0.899,2.784 ; pad.5@9.128,-4.978 ccw(c8.66,-4.511) 9.321,-4.511 ccw(c9.982,-4.511) pad.5@9.515,-4.978
  Bottom Layer w0.152: v1@-1.016,2.502 cw(c-1.016,1.524) -0.325,2.216 ; v1@-1.016,2.654 cw(c-1.016,2.045) -0.585,2.476 ; v1(-1.016,2.667) -0.776,2.667 U3.24 ; -0.327,2.217 cw(c-0.794,1.75) U3.24@-0.133,1.75 ; -0.066,1.957 cw(c-0.274,1.75) U3.24@0.019,1.75
GPIO12: pad.11 U3.10 | length 7.9
  Bottom Layer w0.152: U3.10 3.841,-3.257 4.115,-3.531 7.112,-3.531 8.033,-4.452 pad.11 ; pad.11@7.84,-4.978 ccw(c7.372,-4.511) 8.033,-4.511 ccw(c8.694,-4.511) pad.11@8.227,-4.978
GPIO13: pad.10 U3.12 | length 7.8
  Bottom Layer w0.152: U3.12 2.841,-3.476 3.175,-3.81 6.121,-3.81 6.782,-4.47 pad.10 ; pad.10@6.588,-4.978 ccw(c6.119,-4.51) 6.782,-4.51 ; 6.782,-4.512 ccw(c7.441,-4.512) pad.10@6.975,-4.978
GPIO14: pad.12 U3.9 | length 8.6
  Bottom Layer w0.152: U3.9 4.341,-3.096 4.496,-3.251 8.103,-3.251 9.321,-4.47 pad.12 ; pad.12@9.128,-4.978 ccw(c8.66,-4.511) 9.321,-4.511 ccw(c9.982,-4.511) pad.12@9.515,-4.978
GPIO15: pad.9 R9.2 U3.13 | length 8.7
  Bottom Layer w0.152: R9.2@2.214,-3.924 ccw(c1.908,-3.618) 2.341,-3.618 ; R9.2 5.156,-4.115 5.512,-4.47 pad.9 ; R9.2@2.341,-4.111 U3.13 ; 2.341,-3.637 ccw(c2.747,-3.637) R9.2@2.46,-3.924 ; R9.2@2.46,-4.238 cw(c2.756,-4.534) 2.756,-4.115 cw(c2.756,-3.695) R9.2@2.46,-3.992 ; pad.9@5.318,-4.978 ccw(c4.849,-4.51) 5.512,-4.51 ; 5.512,-4.512 ccw(c6.171,-4.512) pad.9@5.705,-4.978
GPIO16: pad.13 R16.2 U3.8 | length 12.9
  Top Layer w0.152: R16.2@6.227,-1.333 cw(c5.93,-1.63) 6.35,-1.63 cw(c6.77,-1.63) R16.2@6.473,-1.333 ; v1@6.233,-1.915 ccw(c5.951,-1.633) 6.35,-1.633 ccw(c6.749,-1.633) v1@6.467,-1.915 ; v1(6.35,-2.032) R16.2
  Bottom Layer w0.152: U3.8 6.068,-1.75 ; v1@6.185,-2.032 ccw(c5.786,-2.032) 6.068,-1.75 ; v1@6.35,-1.867 cw(c6.35,-1.468) 6.068,-1.75 ; v1@6.467,-2.149 cw(c6.749,-2.431) 6.749,-2.032 cw(c6.749,-1.633) v1@6.467,-1.915 ; pad.13@10.398,-4.978 ccw(c9.929,-4.51) 10.592,-4.51 ; pad.13 10.592,-3.842 8.782,-2.032 v1(6.35,-2.032) 6.068,-1.75 ; 10.592,-4.512 ccw(c11.251,-4.512) pad.13@10.785,-4.978
NetA1_1: A1.1 C12.1 L1.1 | length 6.6
  Bottom Layer w0.5: C12.1 L1.1 A1.1 ; A1.1@14.698,4.432 ccw(c13.93,3.664) 13.93,4.75 ccw(c13.93,5.836) A1.1@14.698,5.068
NetC2_2: C2.2 U1.4 | length 3.9
  Bottom Layer w0.152: C2.2@-10.029,2.189 cw(c-10.326,1.892) -9.906,1.892 cw(c-9.486,1.892) C2.2@-9.783,2.189 ; C2.2 -9.906,1.728 U1.4 ; -9.861,1.684 cw(c-10.585,0.96) U1.4@-9.562,0.96 ; -9.601,1.424 cw(c-10.065,0.96) U1.4@-9.409,0.96 ; -9.341,1.163 cw(c-9.544,0.96) U1.4@-9.257,0.96
NetC4_2: C4.2 U2.6 | length 4.3
  Top Layer w0.152: v1(-9.906,-1.542) -9.315,-0.951 U2.6 ; v1@-9.906,-1.377 ccw(c-9.906,-0.978) -9.624,-1.26 ccw(c-9.342,-1.542) v1@-9.741,-1.542
  Bottom Layer w0.152: C4.2@-10.029,-2.29 ccw(c-10.326,-1.993) -9.906,-1.993 ccw(c-9.486,-1.993) C4.2@-9.783,-2.29 ; v1@-10.023,-1.659 cw(c-10.305,-1.94) -9.906,-1.94 cw(c-9.507,-1.94) v1@-9.789,-1.659 ; C4.2 v1(-9.906,-1.542)
NetC7_2: C7.2 D5.2 R15.1 R16.1 R19.2 U3.32 | length 24.6
  Top Layer w0.152: C7.2@-1.799,3.586 cw(c-2.096,3.289) -1.676,3.289 cw(c-1.257,3.289) C7.2@-1.554,3.586 ; C7.2@-1.47,3.604 cw(c-1.261,3.448) -1.261,3.708 ; C7.2@-1.47,3.813 ccw(c-1.261,3.969) -1.261,3.708 ; -1.183,2.205 ccw(c-0.448,2.939) R15.1@-0.448,1.901 ; -0.923,1.945 ccw(c-0.449,2.419) R15.1@-0.449,1.749 ; R15.1@-0.61,1.663 ccw(c-0.705,1.625) -0.705,1.727 ; R15.1@-0.61,1.792 cw(c-0.705,1.829) -0.705,1.727 ; R15.1@-0.191,1.604 cw(c0.121,1.293) 0.121,1.733 ; R15.1@-0.191,1.85 ccw(c0.092,2.132) 0.092,1.733 ; R19.2@0.893,3.586 ccw(c0.596,3.289) 0.596,3.708 ccw(c0.596,4.128) R19.2@0.893,3.831 ; R19.2@1.139,3.586 cw(c1.436,3.289) 1.436,3.708 cw(c1.436,4.128) R19.2@1.139,3.831 ; 1.835,3.708 ccw(c1.835,4.137) D5.2@2.138,3.834 ; 1.847,3.708 cw(c1.847,3.297) D5.2@2.138,3.588 ; D5.2@2.258,3.708 R19.2 0.448,3.708 -0.005,3.255 -0.808,3.255 -1.261,3.708 ; v1@4.894,2.452 cw(c4.495,2.457) 4.774,2.172 cw(c5.052,1.887) v1@5.057,2.285 ; v1@4.942,2.334 cw(c4.66,2.052) 5.059,2.052 cw(c5.458,2.052) v1@5.176,2.334 ; R16.1@6.227,0.004 ccw(c5.93,-0.293) 5.93,0.127 ccw(c5.93,0.547) R16.1@6.227,0.25 ; R16.1 5.766,0.127 5.059,0.834 v1(5.059,2.45) 4.324,1.733 -0.375,1.733 R15.1 -0.705,1.727 ; -1.261,3.708 C7.2 -1.676,2.699 -0.705,1.727
  Bottom Layer w0.152: U3.32 v1(5.059,2.45) ; 4.659,2.45 ccw(c4.659,2.85) v1@4.942,2.567 ; 4.662,2.45 cw(c4.662,2.053) v1@4.942,2.334
NetC10_1: C10.1 U3.28 Y1.3 | length 9.4
  Bottom Layer w0.152: U3.28 2.341,2.9 2.515,3.073 3.353,3.073 3.517,3.238 ; Y1.3@3.273,3.669 cw(c3.014,3.238) 3.517,3.238 ; Y1.3@3.351,3.8 cw(c3.176,3.507) 3.517,3.507 cw(c3.858,3.507) Y1.3@3.683,3.8 ; Y1.3@3.761,3.669 ccw(c4.02,3.238) 3.517,3.238 ; Y1.3@3.794,3.848 cw(c4.343,3.299) 4.343,4.075 cw(c4.343,4.851) Y1.3@3.794,4.302 ; Y1.3@3.902,3.74 cw(c4.711,2.931) 4.711,4.075 cw(c4.711,5.219) Y1.3@3.902,4.41 ; 4.578,4.075 cw(c4.578,3.647) C10.1@4.881,3.95 ; 4.59,4.075 ccw(c4.59,4.486) C10.1@4.881,4.196 ; C10.1@4.939,4.075 Y1.3 3.517,3.238
NetC11_1: C11.1 U3.27 Y1.1 | length 9.6
  Bottom Layer w0.152: C11.1 Y1.1@1.752,5.41 ; C11.1@0.453,5.287 cw(c0.75,4.991) 0.75,5.41 cw(c0.75,5.83) C11.1@0.453,5.533 ; C11.1@0.456,5.598 ccw(c0.737,5.866) 0.819,5.486 ; C11.1@0.466,5.41 ccw(c0.466,6.776) Y1.1@1.432,5.81 ; 0.78,5.41 cw(c0.78,4.488) Y1.1@1.432,5.14 ; 0.834,5.41 ccw(c0.834,6.408) Y1.1@1.54,5.702 ; 0.914,5.41 0.914,3.54 1.178,3.277 1.676,3.277 1.841,3.112 U3.27 ; 1.148,5.41 cw(c1.148,4.856) Y1.1@1.54,5.248 ; 1.202,5.41 ccw(c1.202,6.04) Y1.1@1.647,5.595
NetC12_2: C12.2 L2.1 U3.2 | length 8.6
  Bottom Layer w0.25: U3.2 5.969,1.25 ccw(c5.969,1.758) 6.477,1.758 6.477,4.242 cw(c6.985,4.242) 6.985,4.75 L2.1 ; 7.096,4.75 cw(c7.096,4.25) 7.49,4.558 ; 7.112,4.75 ccw(c7.112,5.25) L2.1@7.506,4.942 ; L2.1@7.659,4.661 ccw(c7.445,4.448) 7.445,4.75 ccw(c7.445,5.052) L2.1@7.659,4.838
  Bottom Layer w0.5: L2.1 C12.2
NetD1_1: D1.1 R3.2 | length 2.5
  Top Layer w0.152: R3.2 D1.1@-3.305,-5.385 ; R3.2@-4.322,-5.508 cw(c-4.025,-5.804) -4.025,-5.385 cw(c-4.025,-4.965) R3.2@-4.322,-5.262 ; -3.728,-5.385 ccw(c-3.728,-4.957) D1.1@-3.425,-5.259 ; -3.716,-5.385 cw(c-3.716,-5.796) D1.1@-3.425,-5.505
NetD2_2: D2.2 R10.1 | length 3.5
  Top Layer w0.152: D2.2 R10.1 ; D2.2@-0.193,-5.508 cw(c0.104,-5.804) 0.104,-5.385 cw(c0.104,-4.965) D2.2@-0.193,-5.262 ; R10.1@1.718,-5.508 ccw(c1.421,-5.804) 1.421,-5.385 ccw(c1.421,-4.965) R10.1@1.718,-5.262
NetD3_1: D3.1 R1.2 | length 2.5
  Bottom Layer w0.152: D3.1@-10.029,-4.714 ccw(c-10.326,-4.418) -9.906,-4.418 ccw(c-9.486,-4.418) D3.1@-9.783,-4.714 ; R1.2@-10.029,-3.831 cw(c-10.326,-4.128) -9.906,-4.128 cw(c-9.486,-4.128) R1.2@-9.783,-3.831 ; D3.1 R1.2
NetD4_1: D4.1 R2.1 | length 2.5
  Bottom Layer w0.152: R2.1@-10.029,3.73 ccw(c-10.326,4.026) -9.906,4.026 ccw(c-9.486,4.026) R2.1@-9.783,3.73 ; D4.1@-10.029,4.613 cw(c-10.326,4.316) -9.906,4.316 cw(c-9.486,4.316) D4.1@-9.783,4.613 ; R2.1 D4.1
NetD5_1: D5.1 R17.2 | length 2.6
  Top Layer w0.152: D5.1 R17.2@3.553,4.976 ; D5.1@2.383,4.853 cw(c2.68,4.556) 2.68,4.976 cw(c2.68,5.395) D5.1@2.383,5.099 ; 3.13,4.976 ccw(c3.13,5.404) R17.2@3.433,5.101 ; 3.142,4.976 cw(c3.142,4.565) R17.2@3.433,4.856
NetD6_1: D6.1 R4.1 | length 2.5
  Top Layer w0.152: R4.1 D6.1@-8.334,6.198 ; R4.1@-9.351,6.075 cw(c-9.055,5.778) -9.055,6.198 cw(c-9.055,6.617) R4.1@-9.351,6.32 ; -8.757,6.198 cw(c-8.757,5.769) D6.1@-8.454,6.072 ; -8.745,6.198 ccw(c-8.745,6.609) D6.1@-8.454,6.318
NetD7_1: D7.1 R5.2 | length 2.5
  Top Layer w0.152: D7.1 R5.2@-4.778,6.195 ; D7.1@-5.795,6.072 cw(c-5.499,5.776) -5.499,6.195 cw(c-5.499,6.615) D7.1@-5.795,6.318 ; -5.201,6.195 ccw(c-5.201,6.623) R5.2@-4.898,6.32 ; -5.189,6.195 cw(c-5.189,5.784) R5.2@-4.898,6.075
NetR3_1: R3.1 U2.11 | length 3.5
  Top Layer w0.152: U2.11 -6.171,-3.227 -5.969,-3.429 -5.131,-3.429 R3.1 ; -4.857,-3.703 ccw(c-4.445,-3.291) R3.1@-4.445,-3.873 ; R3.1@-4.694,-3.866 cw(c-4.875,-4.047) R3.1@-4.619,-4.047
NetR8_2: R8.2 U3.7 | length 2
  Bottom Layer w0.152: U3.7 5.659,-1.25 5.766,-1.143 R8.2 ; R8.2@6.227,-1.266 ccw(c5.93,-1.563) 5.93,-1.143 ccw(c5.93,-0.723) R8.2@6.227,-1.02
NetR12_2: R12.2 R13.2 | length 3.5
  Top Layer w0.152: R12.2@-1.758,-2.123 ccw(c-1.928,-1.905) -1.651,-1.905 ; R12.2 -1.651,-1.905 ; R12.2@-1.544,-2.123 cw(c-1.374,-1.905) -1.651,-1.905 ; R13.2@-0.488,-0.417 cw(c-0.658,-0.635) -0.381,-0.635 ; R13.2 -0.381,-0.635 ; R13.2@-0.274,-0.417 ccw(c-0.104,-0.635) -0.381,-0.635 ; -1.651,-1.905 -0.381,-0.635
NetR14_1: R14.1 U3.31 | length 5
  Top Layer w0.152: v1@4.402,3.461 ccw(c4.263,3.982) 4.729,3.713 ; v1(4.445,3.302) R14.1@5.004,3.861 ; v1@4.445,3.467 ccw(c4.445,3.866) 4.727,3.584 ccw(c5.009,3.302) v1@4.61,3.302 ; v1@4.557,3.414 ccw(c3.899,4.073) R14.1@4.83,4.073 ; v1@4.604,3.345 cw(c4.854,3.412) 4.63,3.541 ; 4.817,3.674 ccw(c4.419,4.073) R14.1@4.982,4.073
  Bottom Layer w0.152: U3.31 3.841,3.053 4.089,3.302 ; v1@4.319,3.195 ccw(c4.089,3.002) 4.089,3.302 ; v1@4.319,3.409 cw(c4.089,3.602) 4.089,3.302 ; v1(4.445,3.302) 4.089,3.302
RXD: D7.2 R6.2 U2.25 | length 9.9
  Top Layer w0.152: U2.25 -6.174,3.758 -5.918,4.013 ; D7.2@-6.041,4.74 cw(c-6.338,4.443) -5.918,4.443 cw(c-5.499,4.443) D7.2@-5.795,4.74 ; D7.2 -5.918,4.013 ; v1@-2.86,5.293 ccw(c-3.142,5.012) -3.142,5.41 ccw(c-3.142,5.809) v1@-2.86,5.527 ; v1(-2.743,5.41) -3.226,5.41 -4.623,4.013 -5.918,4.013
  Bottom Layer w0.152: v1(-2.743,5.41) R6.2 ; v1@-2.626,5.293 cw(c-2.345,5.012) -2.345,5.41 cw(c-2.345,5.809) v1@-2.626,5.527 ; R6.2@-1.825,5.287 ccw(c-2.121,4.991) -2.121,5.41 ccw(c-2.121,5.83) R6.2@-1.825,5.533
SD_CLK: U3.21 U4.6 | length 5
  Bottom Layer w0.152: U4.6 -0.66,0.635 ; U4.6@-1.065,0.708 cw(c-0.932,0.298) -0.628,0.602 ; U4.6@-1.018,0.562 cw(c-0.846,0.031) -0.452,0.426 ; U4.6@-0.971,0.417 cw(c-0.76,-0.235) -0.275,0.25 ; U4.6@-0.84,0.527 cw(c-0.66,0.432) -0.66,0.635 ; U4.6@-0.84,0.743 ccw(c-0.66,0.838) -0.66,0.635 ; -0.494,0.469 ccw(c-0.084,0.878) U3.21@-0.084,0.299 ; -0.234,0.208 ccw(c-0.084,0.358) U3.21@-0.084,0.146 ; U3.21 -0.275,0.25 ; -0.66,0.635 -0.275,0.25
SD_CMD: U3.20 U4.1 | length 9.2
  Bottom Layer w0.152: U4.1 -5.918,-1.905 -4.013,0 -0.635,0 -0.385,-0.25 U3.20 ; U4.1@-6.468,-2.067 cw(c-6.078,-2.457) -6.078,-1.905 cw(c-6.078,-1.353) U4.1@-6.468,-1.743
SD_DATA_0: U3.22 U4.2 | length 9.9
  Bottom Layer w0.152: U4.2 -5.766,-0.635 -3.861,1.27 -0.787,1.27 -0.267,0.75 U3.22 ; U4.2@-6.468,-0.797 cw(c-6.078,-1.187) -6.078,-0.635 cw(c-6.078,-0.083) U4.2@-6.468,-0.473 ; -0.48,0.963 ccw(c-0.084,1.359) U3.22@-0.084,0.799 ; -0.22,0.703 ccw(c-0.084,0.839) U3.22@-0.084,0.646
SD_DATA_1: U3.23 U4.5 | length 3.4
  Bottom Layer w0.152: U4.5 -0.635,1.905 ; U4.5@-0.846,1.786 cw(c-0.635,1.658) -0.635,1.905 ; U4.5@-0.846,2.024 ccw(c-0.635,2.152) -0.635,1.905 ; -0.239,1.204 ccw(c-0.097,1.347) U3.23@-0.07,1.147 ; U3.23@-0.091,1.298 cw(c-0.148,1.731) -0.457,1.422 ; U3.23 -0.285,1.25 -0.457,1.422 ; -0.635,1.905 -0.457,1.727 -0.457,1.422
SD_DATA_2: U3.18 U4.7 | length 2.9
  Bottom Layer w0.152: U4.7 -0.635,-0.635 ; U4.7@-0.846,-0.754 cw(c-0.635,-0.882) -0.635,-0.635 ; U4.7@-0.846,-0.516 ccw(c-0.635,-0.388) -0.635,-0.635 ; U3.18 -0.401,-1.25 -0.508,-1.143 -0.508,-0.762 -0.635,-0.635
SD_DATA_3: U3.19 U4.3 | length 14
  Bottom Layer w0.152: U4.3 -5.715,0.635 -3.238,3.111 -0.532,3.111 0.694,1.886 0.694,-0.601 ; U4.3@-6.468,0.473 cw(c-6.078,0.083) -6.078,0.635 cw(c-6.078,1.187) U4.3@-6.468,0.797 ; U3.19 0.545,-0.75 0.694,-0.601 ; U3.19@0.348,-0.852 ccw(c0.375,-0.696) 0.487,-0.808 ; U3.19@0.374,-0.702 ccw(c0.438,-0.345) 0.694,-0.601
TXD: D6.2 R7.1 U2.26 | length 10.5
  Top Layer w0.152: D6.2@-8.454,4.74 cw(c-8.751,4.443) -8.331,4.443 cw(c-7.912,4.443) D6.2@-8.208,4.74 ; D6.2@-8.331,4.826 -8.331,4.166 -7.798,3.632 v1(-6.68,3.632) ; v1@-6.797,3.749 cw(c-7.079,4.031) -7.079,3.632 cw(c-7.079,3.234) -6.797,3.515 cw(c-7.095,3.218) -6.674,3.218 ; U2.26 v1@-6.674,3.632 ; -6.674,3.25 cw(c-6.298,3.25) v1@-6.563,3.515
  Bottom Layer w0.152: v1(-6.68,3.632) -4.902,5.41 R7.1 ; v1@-6.68,3.797 ccw(c-6.68,4.196) -6.398,3.914 ccw(c-6.117,3.632) v1@-6.515,3.632 ; R7.1@-3.831,5.287 ccw(c-4.128,4.991) -4.128,5.41 ccw(c-4.128,5.83) R7.1@-3.831,5.533
U0RXD: R7.2 U3.25 | length 5.9
  Bottom Layer w0.152: R7.2@-3.81,3.932 cw(c-3.952,3.734) -3.708,3.734 ; R7.2 -3.708,3.734 ; R7.2@-3.607,3.932 ccw(c-3.465,3.734) -3.708,3.734 ; U3.25 0.623,2.45 -0.356,3.429 -3.404,3.429 -3.708,3.734
U0TXD: R6.1 U3.26 | length 4.7
  Bottom Layer w0.152: R6.1 -0.625,4.14 -0.104,3.619 0.36,3.619 1.335,2.645 1.335,2.455 U3.26 ; R6.1@-1.579,4.017 cw(c-1.282,3.721) -1.282,4.14 cw(c-1.282,4.56) R6.1@-1.579,4.263 ; 1.196,2.784 ccw(c1.341,2.928) U3.26@1.341,2.724
UD_N: J1.2 U2.5 | length 3.6
  Top Layer w0.152: J1.2 -10.287,-1 ; J1.2@-10.462,-1.124 cw(c-10.287,-1.185) -10.287,-1 ; J1.2@-10.462,-0.876 ccw(c-10.287,-0.815) -10.287,-1 ; U2.5 -9.738,-0.451 -10.287,-1
UD_P: J1.3 U2.4 | length 3.8
  Top Layer w0.152: J1.3 -10.287,1 ; J1.3@-10.462,0.876 cw(c-10.287,0.815) -10.287,1 ; J1.3@-10.462,1.124 ccw(c-10.287,1.185) -10.287,1 ; U2.4 -9.336,0.049 -10.287,1
VCC3V3: C3.2 C6.2 C9.2 D2.1 pad.4 R2.2 R4.2 R5.1 R8.1 R11.2 R15.2 R17.1 U1.5 U3.1 U3.3 U3.4 U3.11 U3.17 U3.29 U3.30 U4.8 | length 92.3
  Top Layer w0.152: v1(-11.176,4.928) R4.2 ; v1@-11.059,4.811 cw(c-10.777,4.529) -10.777,4.928 cw(c-10.777,5.326) v1@-11.059,5.044 ; R4.2@-9.597,4.805 ccw(c-9.894,4.508) -9.894,4.928 ccw(c-9.894,5.347) R4.2@-9.597,5.05 ; R5.1@-4.775,5.061 -3.982,5.855 -2.559,5.855 -2.299,5.594 -2.299,2.273 -1.067,1.041 -1.067,-0.635 -3.048,-2.616 ; R5.1@-4.775,5.169 ccw(c-4.775,5.429) -4.591,5.245 ; R5.1@-4.601,4.995 cw(c-4.022,4.995) -4.432,5.404 ; v1@-3.188,-2.921 cw(c-2.789,-2.921) -3.071,-2.639 ; v1@-3.138,-2.783 ccw(c-3.247,-2.616) -3.048,-2.616 ; v1@-3.035,-2.921 cw(c-2.269,-2.921) -2.811,-2.379 ; v1@-2.958,-2.783 cw(c-2.849,-2.616) -3.048,-2.616 ; v1@-2.931,-3.038 cw(c-2.649,-3.32) -2.649,-2.921 cw(c-2.649,-2.522) v1@-2.931,-2.804 ; v1@-2.883,-2.921 cw(c-1.748,-2.921) -2.551,-2.119 ; -2.073,2.048 ccw(c-1.719,2.403) R15.2@-1.719,1.901 ; -1.991,1.966 cw(c-2.23,1.727) R15.2@-1.892,1.727 ; R11.2@-1.774,-4.365 cw(c-2.071,-4.661) -1.651,-4.661 cw(c-1.231,-4.661) R11.2@-1.528,-4.365 ; R11.2@-1.774,-4.119 ccw(c-2.071,-3.822) -1.651,-3.822 ccw(c-1.231,-3.822) R11.2@-1.528,-4.119 ; D2.1@-1.771,-5.262 ccw(c-2.062,-4.971) -1.651,-4.971 ; D2.1@-1.651,-5.382 R11.2 -1.651,-3.277 -2.007,-2.921 v1(-3.048,-2.921) -3.048,-2.616 ; -1.651,-4.959 ccw(c-1.223,-4.959) D2.1@-1.526,-5.262 ; R15.2@-1.562,1.727 ccw(c-1.102,1.727) -1.427,1.402 ; R15.2@-1.41,1.727 ccw(c-0.582,1.727) -1.167,1.142 ; v1(3.341,-3.302) 3.57,-3.531 ; v1@3.367,-3.465 cw(c3.404,-3.696) 3.57,-3.531 ; v1@3.504,-3.328 ccw(c3.735,-3.365) 3.57,-3.531 ; R17.1 4.623,4.775 5.378,4.775 5.503,4.649 v1(5.503,3.437) ; R17.1@3.556,3.95 ccw(c3.556,4.532) 3.968,4.12 ; R17.1@3.73,3.776 cw(c3.986,3.776) R17.1@3.805,3.957 ; v1@5.387,3.554 ccw(c5.105,3.836) 5.503,3.836 ccw(c5.902,3.836) v1@5.62,3.554 ; pad.4@7.84,-4.978 ccw(c7.372,-4.511) 8.033,-4.511 ccw(c8.694,-4.511) pad.4@8.227,-4.978 ; pad.4 8.033,-4.452 7.112,-3.531 3.57,-3.531
  Bottom Layer w0.152: R2.2@-11.299,3.73 ccw(c-11.596,4.026) -11.176,4.026 ccw(c-10.756,4.026) R2.2@-11.053,3.73 ; v1@-11.293,4.811 cw(c-11.575,4.529) -11.176,4.529 cw(c-10.777,4.529) v1@-11.059,4.811 ; R2.2@-11.271,3.461 cw(c-11.386,3.285) -11.176,3.285 ; R2.2@-11.24,3.607 ccw(c-10.621,3.605) -11.058,3.168 ; v1(-11.176,4.928) R2.2 -11.176,3.285 ; R2.2@-11.087,3.607 ccw(c-10.106,3.603) -10.8,2.909 ; R2.2@-11.081,3.461 ccw(c-10.966,3.285) -11.176,3.285 ; R2.2@-10.935,3.606 ccw(c-9.591,3.601) -10.541,2.65 ; U1.5@-9.526,-1.027 ccw(c-9.737,-1.239) -9.737,-0.94 ccw(c-9.737,-0.641) U1.5@-9.526,-0.852 ; U1.5@-9.226,-1.027 cw(c-9.437,-1.239) -9.138,-1.239 cw(c-8.839,-1.239) U1.5@-9.05,-1.027 ; C3.2@-8.683,-3.569 ccw(c-8.979,-3.272) -8.56,-3.272 ccw(c-8.14,-3.272) C3.2@-8.437,-3.569 ; C3.2 -8.56,-2.534 ; C9.2@-4.06,-3.611 ccw(c-4.372,-3.299) -3.931,-3.299 ; C9.2@-3.931,-3.728 -3.931,-2.534 ; -3.931,-3.329 ccw(c-3.532,-3.329) C9.2@-3.814,-3.611 ; -3.67,-2.299 v1(-3.048,-2.921) ; v1@-3.213,-2.921 ccw(c-3.612,-2.921) -3.33,-2.639 ccw(c-3.048,-2.357) v1@-3.048,-2.756 ; U4.8@-2.625,-2.067 ccw(c-3.016,-2.457) -3.016,-1.905 ccw(c-3.016,-1.353) U4.8@-2.625,-1.743 ; U4.8 -3.302,-1.905 -3.931,-2.534 ; U4.8@-1.727,-1.93 -0.559,-1.93 ; U4.8@-0.878,-2.065 cw(c-0.559,-2.376) -0.559,-1.93 ; U4.8@-0.853,-1.776 ccw(c-0.559,-1.574) -0.559,-1.93 ; C6.2@-0.504,-3.611 ccw(c-0.801,-3.314) -0.381,-3.314 ccw(c0.039,-3.314) C6.2@-0.258,-3.611 ; C6.2 -0.381,-2.886 0.141,-2.364 U3.17 -0.378,-1.75 -0.559,-1.93 ; U3.17@0.143,-1.753 0.737,-1.753 0.837,-1.853 4.325,-1.853 4.444,-1.734 4.444,1.728 ; U3.29 2.841,2.003 2.99,1.853 4.325,1.853 4.444,1.734 4.444,1.728 ; v1@3.224,-3.185 ccw(c2.943,-2.904) 3.341,-2.904 ; v1(3.341,-3.302) U3.11 3.341,-1.865 ; 3.341,-2.903 ccw(c3.74,-2.903) v1@3.458,-3.185 ; 3.341,1.865 U3.30 ; 4.457,0.75 U3.3 ; 4.465,0.25 U3.4 ; 4.645,1.728 ccw(c4.645,1.92) U3.1@4.781,1.785 ; U3.1@5.011,1.73 cw(c5.098,1.737) U3.1@5.036,1.799 ; U3.1@5.019,1.728 4.444,1.728 ; U3.1 5.041,1.804 5.503,2.266 ; U3.4@5.045,0.254 5.639,0.254 5.766,0.127 R8.1 ; U3.1@5.163,1.742 cw(c5.531,1.771) 5.27,2.033 ; U3.4@5.3,0.215 cw(c5.393,0.123) 5.393,0.254 ; U3.1@5.314,1.754 cw(c5.965,1.805) 5.503,2.266 ; v1@5.387,3.321 cw(c5.105,3.039) 5.503,3.039 cw(c5.902,3.039) v1@5.62,3.321 ; v1(5.503,3.437) 5.503,2.266 ; R8.1@6.227,0.004 ccw(c5.93,-0.293) 5.93,0.127 ccw(c5.93,0.547) R8.1@6.227,0.25 ; -11.176,3.285 -10.541,2.65 ; -10.541,2.65 -10.541,-0.305 -9.906,-0.94 U1.5 -9.138,-1.956 -8.56,-2.534 ; -8.56,-2.534 -3.931,-2.534
VCC5V: C1.2 C5.1 J1.1@-11.614,-3.5 R1.1 U1.1 U1.3 U2.7 U2.8 U2.9 | length 31.5
  Top Layer w0.152: v1@-12.309,-2.403 cw(c-12.591,-2.685) -12.192,-2.685 cw(c-11.793,-2.685) v1@-12.075,-2.403 ; v1(-12.192,-2.286) -12.192,-2.922 -11.614,-3.5 -9.711,-3.5 ; J1.1@-10.658,-3.657 cw(c-10.28,-4.035) -10.28,-3.5 cw(c-10.28,-2.965) J1.1@-10.658,-3.343 ; J1.1@-10.55,-3.764 cw(c-9.912,-4.402) -9.912,-3.5 cw(c-9.912,-2.598) J1.1@-10.55,-3.236 ; -9.611,-3.6 ccw(c-8.89,-2.879) C1.2@-8.89,-3.899 ; -9.351,-3.86 ccw(c-8.89,-3.4) C1.2@-8.89,-4.051 ; C1.2 -9.071,-4.14 -9.711,-3.5 ; -8.661,-2.432 U2.7 U2.8@-7.671,-2.441 ; U2.7@-8.645,-1.451 ccw(c-8.605,-1.451) U2.7@-8.633,-1.479 ; U2.7@-8.492,-1.451 ccw(c-8.084,-1.451) -8.373,-1.739 ; -8.441,-1.671 ccw(c-7.671,-0.901) U2.8@-7.671,-1.99 ; U2.7@-8.34,-1.451 ccw(c-7.564,-1.451) -8.113,-1.999 ; U2.7@-8.188,-1.451 ccw(c-7.044,-1.451) -7.853,-2.259 ; -8.181,-1.931 ccw(c-7.671,-1.421) U2.8@-7.671,-2.142 ; -7.921,-2.191 ccw(c-7.671,-1.941) U2.8@-7.671,-2.295 ; -7.843,-2.441 cw(c-7.843,-2.636) U2.8@-7.705,-2.498 ; U2.8@-7.636,-2.498 cw(c-7.498,-2.636) -7.498,-2.441 ; -7.343,-2.441 cw(c-7.343,-2.636) U2.9@-7.205,-2.498 ; U2.9@-7.193,-2.441 U2.8@-7.671,-2.441 ; U2.9 -7.171,-3.243 -6.985,-3.429 -6.452,-3.429 C5.1 ; -6.152,-3.728 ccw(c-5.74,-3.316) C5.1@-5.74,-3.899 ; C5.1@-5.989,-3.891 cw(c-6.171,-4.073) C5.1@-5.914,-4.073 ; -9.711,-3.5 -8.652,-2.441 U2.8@-7.671,-2.441
  Bottom Layer w0.152: -12.635,0.301 ccw(c-13.295,0.96) U1.3@-12.362,0.96 ; -12.608,-0.346 cw(c-13.201,-0.94) U1.1@-12.362,-0.94 ; -12.375,0.561 ccw(c-12.774,0.96) U1.3@-12.209,0.96 ; -12.347,-0.607 cw(c-12.681,-0.94) U1.1@-12.209,-0.94 ; U1.1@-12.326,-1.027 cw(c-12.648,-1.35) -12.192,-1.35 ; v1@-12.309,-2.403 cw(c-12.591,-2.685) -12.192,-2.685 cw(c-11.793,-2.685) v1@-12.075,-2.403 ; v1@-12.309,-2.169 ccw(c-12.591,-1.887) -12.192,-1.887 ccw(c-11.793,-1.887) v1@-12.075,-2.169 ; U1.1@-12.192,-1.118 v1(-12.192,-2.286) -12.192,-3.2 -11.684,-3.708 R1.1 ; U1.1@-12.014,-0.94 -12.641,-0.313 -12.641,0.294 -11.975,0.96 U1.3 ; U1.3@-11.557,0.96 U1.3@-11.52,0.96 ; R1.1@-11.366,-3.831 ccw(c-11.663,-4.128) -11.663,-3.708 ccw(c-11.663,-3.289) R1.1@-11.366,-3.586
pads on no net: A1.0 J1.1@-14.884,3.683 U2.1 U2.2 U2.10 U2.12 U2.13 U2.14 U2.15 U2.16 U2.17 U2.18 U2.19 U2.20 U2.21 U2.22 U2.23 U2.24 U2.27 U2.28 U3.5

## Polygon pours and split planes (outlines as drawn)
GND on Top Layer "Bottom Layer-No Net" (solid, remove dead copper, pour order 23): -16.5,6.125 -15.625,7 12.316,7 12.316,-7 -15.625,-7 -16.5,-6.125 -16.5,6.125
GND on Bottom Layer "Bottom Layer-No Net" (solid, remove dead copper, pour order 19): -16.5,6.125 -15.625,7 12.316,7 12.316,-7 -15.625,-7 -16.5,-6.125 -16.5,6.125

## Keep-outs
Keep-Out Layer:
  lines w0.1: -0.011,-6.125 cw(c-0.011,-7) 0.864,-7 ; 0,-6.125 -1.75,-6.125 ccw(c-1.75,-7) -2.625,-7 -6.55,-7 -6.55,-4.875 ccw(c-7.15,-4.875) -7.75,-4.875 -7.75,-7 -15.625,-7 ccw(c-16.5,-7) -16.5,-6.125 -16.5,6.125 ccw(c-16.5,7) -15.625,7 -7.75,7 -7.75,4.875 ccw(c-7.15,4.875) -6.55,4.875 -6.55,7 -2.625,7 ccw(c-1.75,7) -1.75,6.125 0,6.125 ccw(c0,7) 0.875,7 15.936,7 16.5,6.436 16.5,-6.462 15.962,-7 0.875,-7

## Silkscreen, mask and mechanical layers (free items; w line width, h text height)
Top Overlay:
  drawing of 3502 lines, arcs and shapes, not listed
  text "α" at 2.819,0.305 h1.52
  text "S" at 1.467,-0.152 h1.52
  text "T" at 2.692,-1.524 h1.52
  text "CloudNode" at 14.097,-3.454 h1.52 r90
  text "IO4" at 4.572,-4.572 h1.02 r90
  text "IO0" at 5.842,-4.572 h1.02 r90
  text "IO2" at 7.112,-4.572 h1.02 r90
  text "3V3" at 8.357,-4.572 h1.02 r90
  text "IO5" at 9.652,-4.572 h1.02 r90
  text "GND" at 10.922,-4.572 h1.02 r90
  text "www.SimpleTeam.com" at 15.494,-4.623 h1.02 r90
Bottom Overlay:
  lines w0.1: 12.316,-7 12.316,7
  text "GND" at 4.572,-2.667 h1.02 r90
  text "ADC" at 12.167,-2.718 h1.02 r90
  text "IO15" at 5.842,-2.743 h1.02 r90
  text "IO13" at 7.112,-2.743 h1.02 r90
  text "IO16" at 10.922,-2.743 h1.02 r90
  text "IO12" at 8.357,-2.769 h1.02 r90
  text "IO14" at 9.652,-2.769 h1.02 r90